# EAGLE board mainpanel (EAGLE 8.6.0)
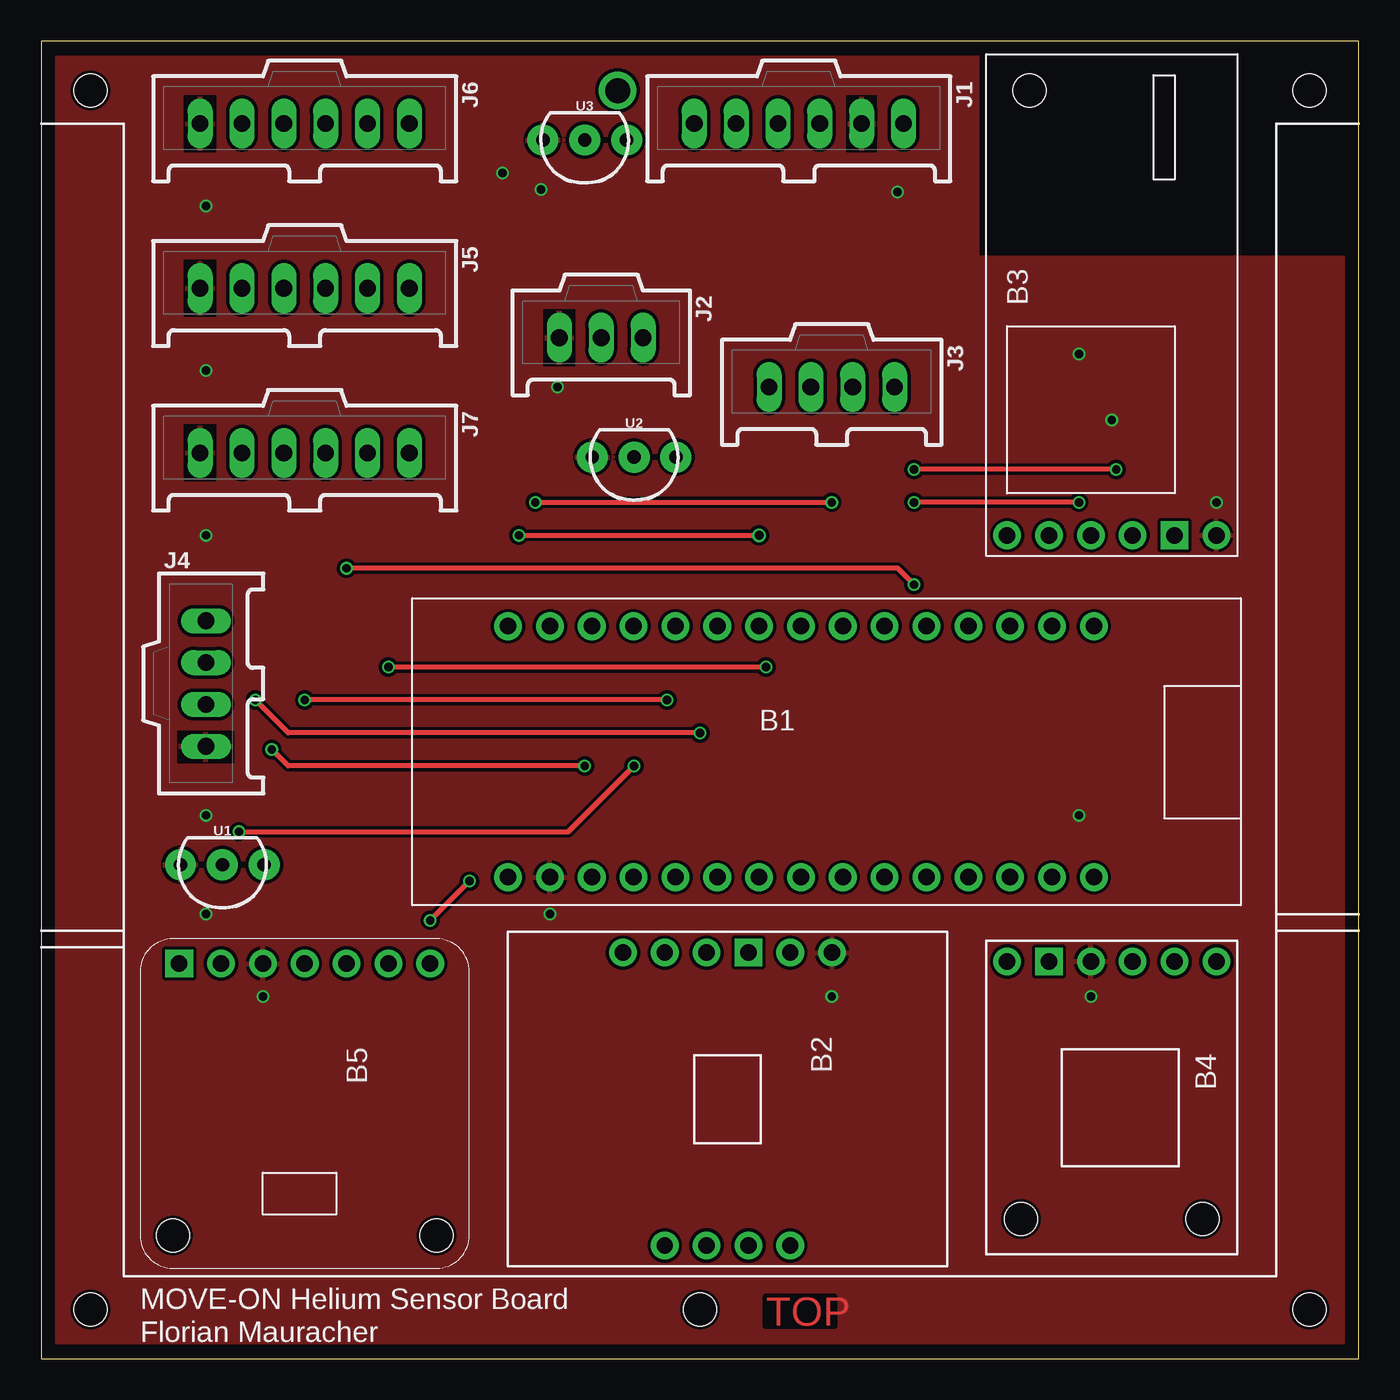
[diagram p0: board, top side]
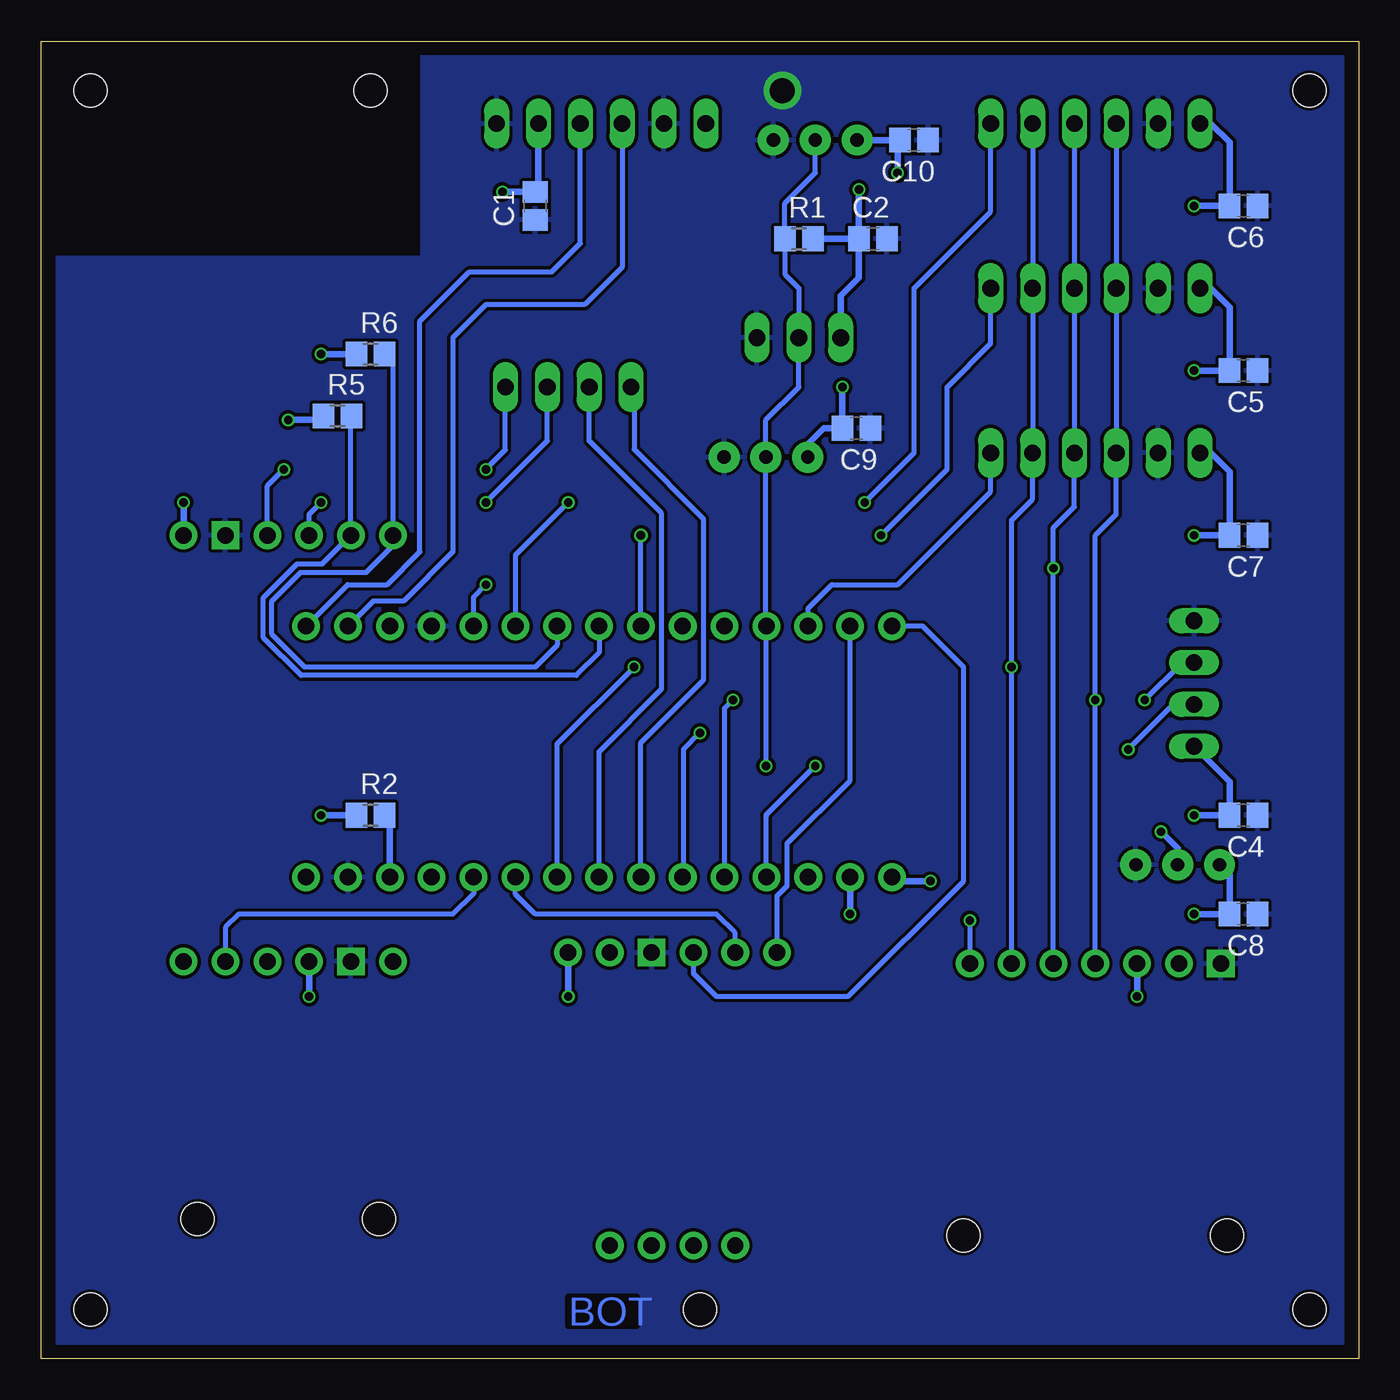
[diagram p1: board, bottom side, seen from below]

Size 80 x 80 mm. Coordinates in mm from the lower left corner, seen from the top.
Outline: 0,0 80,0 80,80 0,80 0,0
Copper layers (1*16): Top 0.018mm / dielectric 1.55mm / Bottom 0.018mm
Design rules "Multi-CB_2L": minimum track width 0.1mm, minimum drill 0.2mm, track to track 0.1mm, track to pad 0.1mm, pad to pad 0.1mm, via to via 0.1mm, smd to smd 0mil, copper to edge 0.2mm, drill to drill 0.2mm, minimum pad ring 0.125mm, minimum via ring 0.1mm, stop-mask expansion 2mil, vias tented up to drill 0.45mm, thermal gap 0.2mm
Net classes: 0 default: width 0.254 mm, drill 0.508 mm, clearance 0.203 mm
Holes 2 mm at 3,3 77,3 77,77 3,77 40,3 24,7.5 8,7.5 59.5,8.5 70.5,8.5 60,77
tRestrict: area 57,67 to 80,80; area 32.4,53.7 to 34.5,55.8; area 29.4,72.9 to 31.5,75.1; area 7.4,28.9 to 9.5,31.1; 24 lines
bRestrict: area 57,67 to 80,80

## Footprints (pad centres in the part's own frame; a part is rotated, then mirrored left to right if it is on the bottom)
NUCLEO-32 = drill 1 pad 1.676: 3V3 7.62,-16.51; 5V 7.62,8.89; A0 7.62,-11.43; A1 7.62,-8.89; A2 7.62,-6.35; A3 7.62,-3.81; A4 7.62,-1.27; A5 7.62,1.27; A6 7.62,3.81; A7 7.62,6.35; D0/RX -7.62,13.97; D1/TX -7.62,16.51; D2 -7.62,6.35; D3 -7.62,3.81; D4 -7.62,1.27; D5 -7.62,-1.27; D6 -7.62,-3.81; D7 -7.62,-6.35; D8 -7.62,-8.89; D9 -7.62,-11.43; D10 -7.62,-13.97; D11 -7.62,-16.51; D12 -7.62,-19.05; D13 7.62,-19.05; GND@1 -7.62,8.89; GND@2 7.62,13.97; REF 7.62,-13.97; RST@1 -7.62,11.43; RST@2 7.62,11.43; VIN 7.62,16.51
BOSCH-BNO055 = drill 1 pad 1.676: 3VO -3.81,-8.89; ADR 3.81,8.89; INT 1.27,8.89; PS0 -3.81,8.89; PS1 -1.27,8.89; RST 6.35,-8.89; SCL 3.81,-8.89; SDA 1.27,-8.89; VIN -6.35,-8.89 | drill 1 pad 1.676 square: GND -1.27,-8.89
UPUTRONICS-UBLOX-PICO = drill 1 pad 1.676 square: GND 3.81,0 | drill 1 pad 1.676: RXD 1.27,0; SCL -3.81,0; SDA -6.35,0; TXD -1.27,0; VCC 6.35,0
SPARKFUN-OPENLOG = drill 1 pad 1.676: BLK 6.35,-8.128; GRN -6.35,-8.128; RXI -3.81,-8.128; TXO -1.27,-8.128; VCC 1.27,-8.128 | drill 1 pad 1.676 square: GND 3.81,-8.128
WATTEROT-BME680 = drill 1 pad 1.676: 2 5.08,0; CS -7.62,0; SCL/SCK 0,0; SDA/MOSI -2.54,0; SDO/MISO -5.08,0; VCC 2.54,0 | drill 1 pad 1.676 square: GND 7.62,0
C2012 = smd 1.3 x 1.5: 1 -0.85,0; 2 0.85,0
90136-1?06 = drill 1.016 long: 1 -6.35,0; 2 -3.81,0; 3 -1.27,0; 4 1.27,0; 5 3.81,0; 6 6.35,0
90136-1?03 = drill 1.016 long: 1 -2.54,0; 2 0,0; 3 2.54,0
90136-1?04 = drill 1.016 long: 1 -3.81,0; 2 -1.27,0; 3 1.27,0; 4 3.81,0
R2012 = smd 1.3 x 1.5: 1 -0.85,0; 2 0.85,0
TO-92-AMMO = drill 0.813 pad 1.88: 1 -2.54,0; 2 0,0; 3 2.54,0

## Placement (x,y rotation side)
B1  NUCLEO-32  [NUCLEO-32]  47.4,36.86 270 top
B2  BNO055  [BOSCH-BNO055]  41.67,15.77 180 top
B3  UBLOX  [UPUTRONICS-UBLOX-PICO]  65,50 0 top
B4  OPENLOG  [SPARKFUN-OPENLOG]  65,16 180 top
B5  BME680  [WATTEROT-BME680]  16,24 180 top
C1  1uF  [C2012]  50,70 90 bottom
C2  0.1uF  [C2012]  29.5,68 0 bottom
C4  0.1uF  [C2012]  7,33 180 bottom
C5  0.1uF  [C2012]  7,60 180 bottom
C6  0.1uF  [C2012]  7,70 180 bottom
C7  0.1uF  [C2012]  7,50 180 bottom
C8  0.1uF  [C2012]  7,27 180 bottom
C9  0.1uF  [C2012]  30.5,56.5 180 bottom
C10  0.1uF  [C2012]  27,74 180 bottom
J1  CDH  [90136-1?06]  46,75 180 top
J2  OW  [90136-1?03]  34,62 180 top
J3  DBG  [90136-1?04]  48,59 180 top
J4  SUN-UART  [90136-1?04]  10,41 270 top
J5  ADCS  [90136-1?06]  16,65 180 top
J6  ENV  [90136-1?06]  16,75 180 top
J7  SUN  [90136-1?06]  16,55 180 top
R1  4.7k  [R2012]  34,68 0 bottom
R2  10k  [R2012]  60,33 0 bottom
R5  4.7k  [R2012]  62,57.25 0 bottom
R6  4.7k  [R2012]  60,61 0 bottom
U1  DS18B20  [TO-92-AMMO]  11,30 180 top
U2  DS18B20  [TO-92-AMMO]  36,54.75 180 top
U3  DS18B20  [TO-92-AMMO]  33,74 180 top

## Library data of the parts
B1-B5 = Frcy
C1 C2 C4-C10 = rcl; SPICEPREFIX: C
J1-J7 = con-molex-c-grid
R1 R2 R5 R6 = rcl; SPICEPREFIX: R
U1-U3 = Frcy; STORE_ID: SEN-00245

## Nets
5V: B1.5V
CDH-RX: B1.D0/RX J1.4
CDH-TX: B1.D1/TX J1.3
DBG-RX: B1.A4 J3.3
DBG-TX: B1.A3 J3.4
GND: B1.GND@1 B1.GND@2 B2.GND B3.GND B4.GND B5.GND C1.1 C2.2 C4.1 C5.1 C6.1 C7.1 C8.1 C9.1 C10.1 J1.1 J1.5 J2.1 J4.1 J5.5 J6.5 J7.5 U1.1 U2.1 U3.1
GPS-RX: B3.RXD J3.1
GPS-SCL: B1.D5 B3.SCL R5.2
GPS-SDA: B1.D4 B3.SDA R6.2
GPS-TX: B3.TXD J3.2
GRN: B4.GRN
IMU-RST: B1.D11 B2.RST
IMU-SCL: B1.A6 B2.SCL
IMU-SDA: B1.D12 B2.SDA
LOG-UART: B1.A7 B4.RXI
NUC-RST: B1.RST@2 R2.2
SPI-CS-ADCS: B1.D6 J5.1
SPI-CS-ENO: B1.D13 B5.CS
SPI-CS-ENV: B1.D3 J6.1
SPI-CS-SUN: B1.D10 J7.1
SPI-MISO: B1.A5 B5.SDO/MISO J5.2 J6.2 J7.2
SPI-MOSI: B1.D2 B5.SDA/MOSI J5.3 J6.3 J7.3
SPI-SCK: B1.A1 B5.SCL/SCK J5.4 J6.4 J7.4
SUN-RX: B1.A2 J4.2
SUN-TX: B1.A0 J4.3
TEMP-OW: B1.D9 J2.2 R1.1 U1.2 U2.2 U3.2
VCC: B1.3V3 B2.VIN B3.VCC B4.VCC B5.VCC C1.2 C2.1 C4.2 C5.2 C6.2 C7.2 C8.2 C9.2 C10.2 J1.2 J2.3 J4.4 J5.6 J6.6 J7.6 R1.2 R2.1 R5.1 R6.1 U1.3 U2.3 U3.3
VIN: B1.VIN

## Tracks (layer width: path | path; a pad name or v marks a point on that pad's centre or on a via)
CDH-RX
  Bottom 0.305: B1.D0/RX 59.85,46 58,46 55,49 55,62 53,64 47,64 44.73,66.27 J1.4
CDH-TX
  Bottom 0.305: B1.D1/TX 61.39,47 59,47 57,49 57,63 54,66 49,66 47.27,67.73 J1.3
DBG-RX
  Bottom 0.305: B1.A4 46.13,36.87 42.33,40.67 42.33,51.33 46.73,55.73 J3.3
DBG-TX
  Bottom 0.305: B1.A3 43.59,37.41 39.79,41.21 39.79,51 44,55.21 44,58.81 J3.4
GND  (via drill 1.52)
  other vias: 35,77
  pour Bottom: 1,79 79,79 79,1 1,1
GPS-RX  (via drill 0.51)
  Top 0.305: v65.27,54 v53,54
  Bottom 0.305: B3.RXD 66.27,53 v65.27,54 | v53,54 51.81,55.19 J3.1
GPS-SCL
  Bottom 0.305: R5.2 61.19,57.21 B3.SCL 62.93,48.26 64.46,48.26 66.51,46.21 66.51,43.79 64.21,41.49 47.51,41.49 46.13,42.87 B1.D5
GPS-SDA
  Bottom 0.305: R6.2 58.65,60.5 B3.SDA 58.65,49.35 60.25,47.75 64.25,47.75 66,46 66,44 64,42 50,42 48.67,43.33 B1.D4
GPS-TX  (via drill 0.51)
  Top 0.305: v63,52 v53,52
  Bottom 0.305: B3.TXD 63.73,51.27 v63,52 | v53,52 49.27,55.73 J3.2
IMU-RST
  Bottom 0.305: B2.RST 35.32,28.11 34.71,28.72 34.71,31.29 30.89,35.11 B1.D11
IMU-SCL
  Bottom 0.305: B2.SCL 37.86,25.86 39,27 50,27 51.21,28.21 B1.A6
IMU-SDA
  Bottom 0.305: B1.D12 26.48,44.48 24,42 24,29 31,22 39,22 40.4,23.4 B2.SDA
LOG-UART
  Bottom 0.305: B1.A7 53.75,28.25 55,27 68,27 68.81,26.19 B4.RXI
NUC-RST
  Bottom 0.406: B1.RST@2 58.83,32.68 R2.2
SPI-CS-ADCS  (via drill 0.51, 0.55)
  Top 0.305: v29,50 v43.59,50
  Bottom 0.305: v29,50 25,54 25,59 22.35,61.65 J5.1 | B1.D6 v43.59,50
SPI-CS-ENO  (via drill 0.51)
  Top 0.305: v26,29 v23.62,26.62
  Bottom 0.305: v23.62,26.62 B5.CS
  Bottom 0.406: B1.D13 28.11,29 v26,29
SPI-CS-ENV  (via drill 0.51)
  Top 0.305: v30,52 v48,52
  Bottom 0.305: v30,52 27,55 27,65 22.35,69.65 J6.1 | v48,52 51.21,48.79 B1.D3
SPI-CS-SUN
  Bottom 0.305: B1.D10 33.43,45.57 32,47 28,47 22.35,52.65 J7.1
SPI-MISO  (via drill 0.51)
  Top 0.305: v44,42 v21.08,42
  Bottom 0.305: J6.2 J5.2 J7.2 19.81,52.19 21.08,50.92 v21.08,42 B5.SDO/MISO | B1.A5 48.67,37.33 v44,42
SPI-MOSI  (via drill 0.51)
  Top 0.305: v53,47 52,48 v18.54,48
  Bottom 0.305: J6.3 J5.3 J7.3 17.27,51.73 18.54,50.46 v18.54,48 B5.SDA/MOSI | B1.D2 53.75,46.25 v53,47
SPI-SCK  (via drill 0.51)
  Top 0.305: v38,40 v16,40
  Bottom 0.305: J6.4 J5.4 J7.4 14.73,51.27 16,50 v16,40 B5.SCL/SCK | B1.A1 38.51,39.49 v38,40
SUN-RX  (via drill 0.51)
  Top 0.305: v40,38 15,38 v13,40
  Bottom 0.305: B1.A2 41,29.29 41,37 v40,38 | v13,40 10.73,42.27 J4.2
SUN-TX  (via drill 0.51)
  Top 0.305: v33,36 15,36 v14,37
  Bottom 0.305: B1.A0 35.97,32.97 36,33 v33,36 | v14,37 11.27,39.73 J4.3
TEMP-OW  (via drill 0.51)
  Top 0.305: v12,32 32,32 v36,36
  Bottom 0.305: v36,36 36,44.45 B1.D9 36,44.51 U2.2 36,57 34,59 J2.2 34,65 34.85,65.85 R1.1 34.85,70.15 33,72 U3.2
  Bottom 0.406: v12,32 11,31 U1.2
VCC  (via drill 0.51)
  Bottom 0.406: J6.6 9,75 7.85,73.85 C6.2 v10,70 | v10,60 C5.2 7.85,63.85 9,65 J5.6 | J7.6 9,55 7.85,53.85 C7.2 v10,50 | J4.4 7.85,35.04 C4.2 v10,33 | R2.1 v63,33 | J1.2 49.81,71.04 C1.2 v52,70.85 | B1.3V3 v30.89,27 | B2.VIN 48,24.64 v48,22 | B4.VCC v63.73,22 | B3.VCC v71.35,52 | B5.VCC v13.46,22 | C2.1 30.35,65.65 31.46,64.54 J2.3 | C2.1 v30.35,71 | R6.1 v63,61 | R5.1 63.1,57 v65,57 | C2.1 R1.2 | U2.3 33.46,55.54 32.5,56.5 C9.2 v31.35,59 | U3.3 C10.2 28,73.85 v28,72 | v10,27 C8.2 7.85,29.39 U1.3
  pour Top: 1,79 79,79 79,1 1,1

## Text on the board
Top: TOP
Bottom: BOT
tNames: MOVE-ON Helium Sensor Board | Florian Mauracher